# Altium PCB PCB.PcbDoc
Units mm, origin at the board's own origin, x right, y up, seen from the top; angles counter-clockwise.
Board outline 48.53 x 25.4 mm, 2 copper layers (Top, Bottom), stack 1.536 mm thick; 44 components, 40 nets, 171 pads, 87 vias.
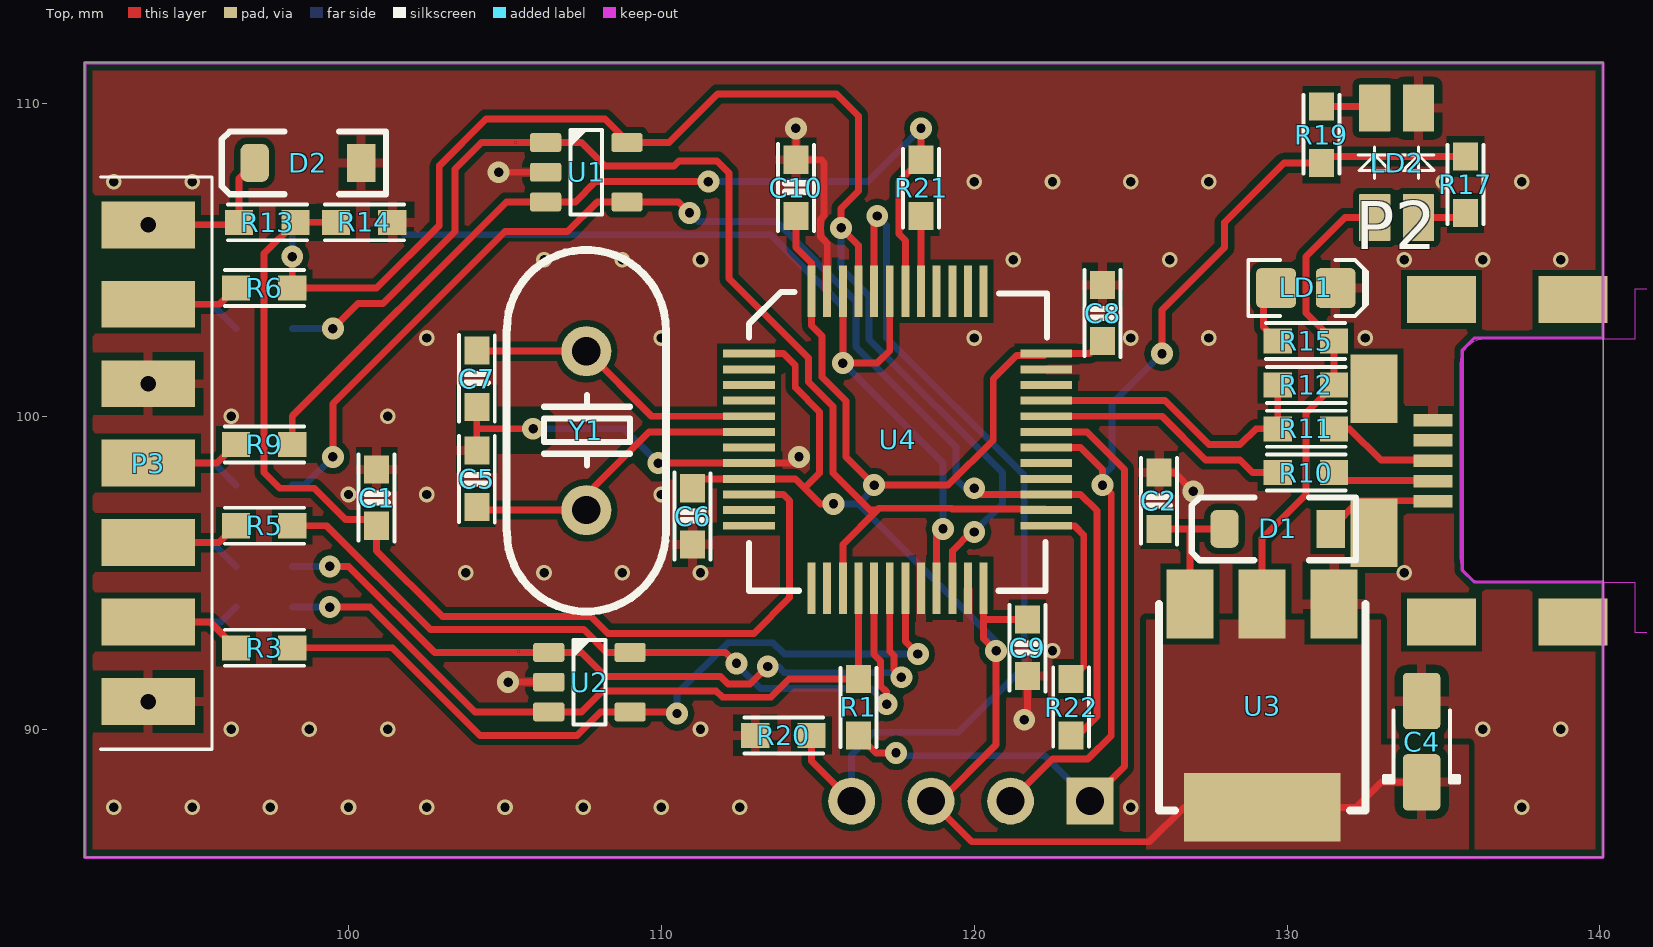
[diagram p0: Top view]
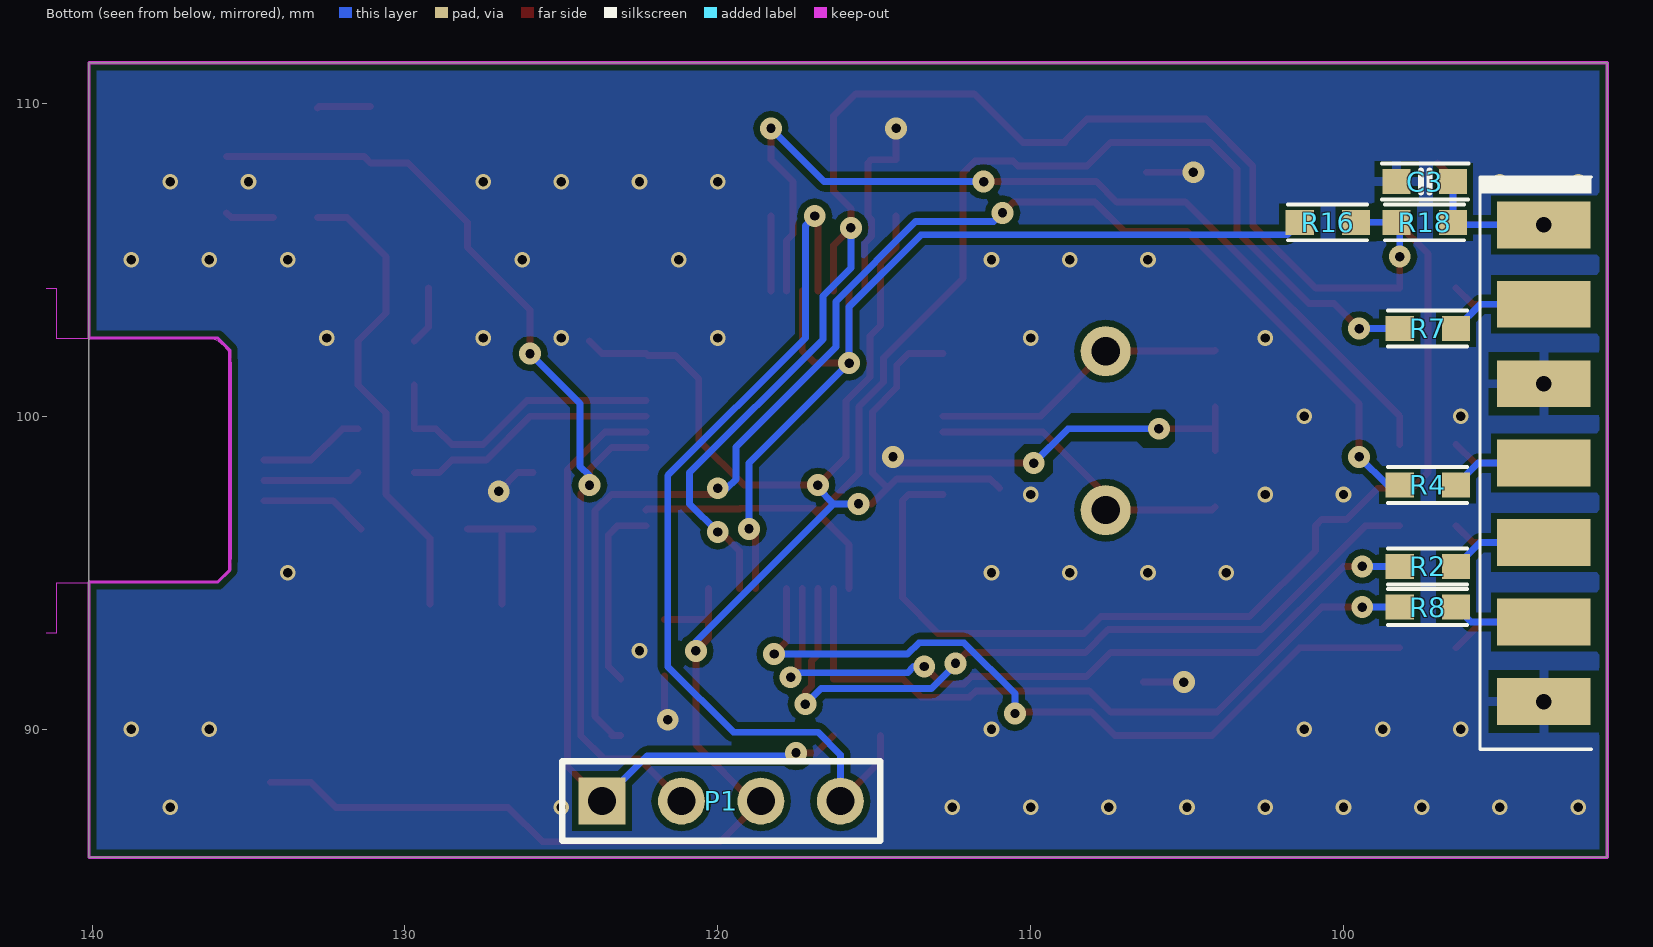
[diagram p1: Bottom view, seen from below]
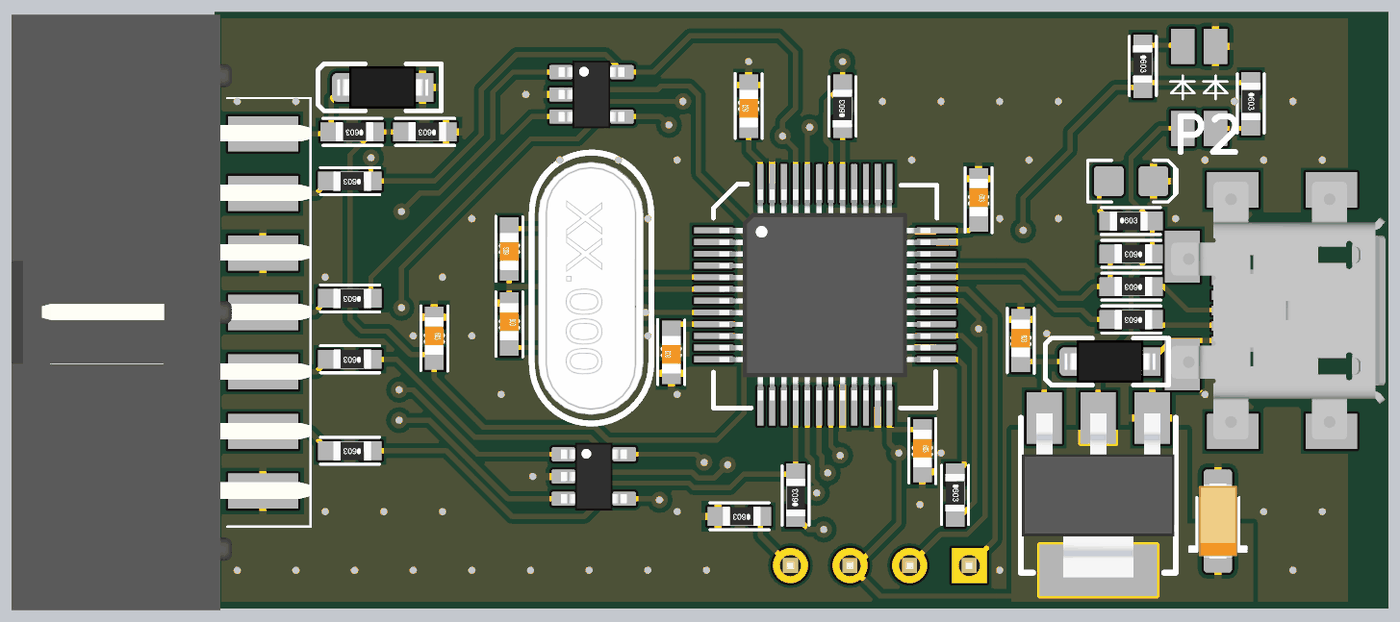
[diagram p2: 3D render of the assembled board from above, using the file's embedded part models]
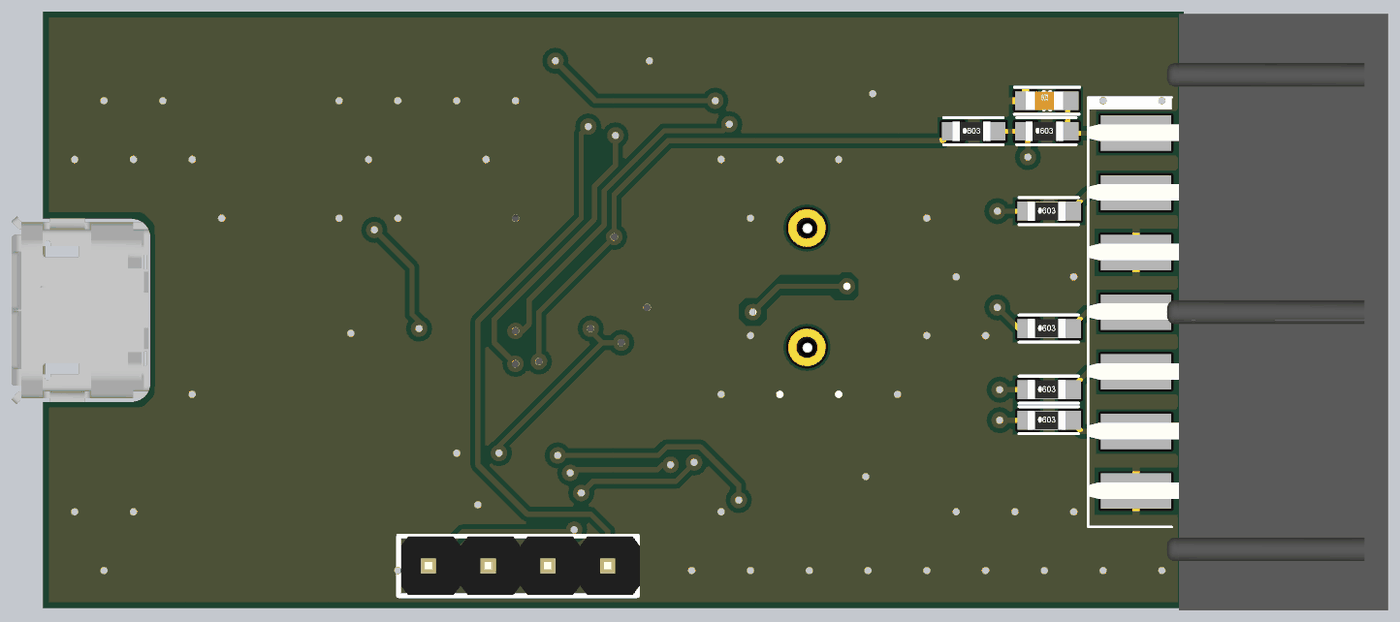
[diagram p3: 3D render of the assembled board from below, using the file's embedded part models]

## Layer stack, top to bottom
Top Solder: solder mask 0.01, Solder Resist, Dk 3.5
Top: signal copper 0.018
Dielectric 1: dielectric 1.5, FR-4, Dk 4.8
Bottom: signal copper 0.018
Bottom Solder: solder mask 0.01, Solder Resist, Dk 3.5

## Board outline
91.568,85.9 91.568,111.3 140.1,111.3 140.1,85.9

## Design rules (kind name [scope] priority, off if disabled: settings)
Clearance [All] p1: gap=0.2
FanoutControl Fanout_BGA [IsBGA] p1: bgadir=Out bgaviamode=Centered fanoutstyle=Auto fanoutdirection=InOnly viagrid=0.025 // Fanout_BGA (Default Rule)
PolygonConnect PolygonConnect_3 [((ObjectKind = 'Pad') And (Net = 'GND') And (Component = 'P1') And (AsMM(PadXSize_AllLayers) = 1.5) And (AsMM(PadYSize_AllLayers) = 1.2)) OR ((ObjectKind = 'Pad') And (Net = 'GND') And (Component = 'P1') And (AsMM(PadXSize_AllLayers) = 2.4) And (AsMM(PadYSize_AllLayers) = 1.6))] p1: connectstyle=Direct reliefconductorwidth=0.254 reliefentries=4 polygonreliefangle="90 Angle" airgapwidth=0.254
PolygonConnect PolygonConnect_2 [(ObjectKind = 'Via')] p2: connectstyle=Direct reliefconductorwidth=0.254 reliefentries=4 polygonreliefangle="90 Angle" airgapwidth=0.254
PolygonConnect PolygonConnect_1 [(ObjectKind = 'Pad') And (Net = '+3V3') And (Component = 'U3')] p3: connectstyle=Direct reliefconductorwidth=0.254 reliefentries=4 polygonreliefangle="90 Angle" airgapwidth=0.254
PolygonConnect [All] p4: connectstyle=Relief reliefconductorwidth=0.3 reliefentries=4 polygonreliefangle="90 Angle" airgapwidth=0.254
RoomDefinition St-LinkV2 [InComponentClass('St-LinkV2')] p1: confinementstyle=ConfineIn formatcopy=TRUE lockcomponents=FALSE outline 0,0 50.8,0 50.8,25.4 0,25.4
RoutingVias [All] p1: holewidth=0.7 width=1.27 viastyle="Through Hole" minholewidth=0.3 minwidth=0.7 maxholewidth=0.5 maxwidth=1
SolderMaskExpansion [All] p1: expansion=0.102
Width [All] p1: maxlimit=0.4 minlimit=0.22 preferedwidth=0.3
29 further rules are at their usual default settings.

## Components (designator, comment, footprint, x,y, rotation, side; value= is the part's Value field where it differs from the comment)
C1 "0u1" C0603C 100.9,98.3 r270 top
C2 "0u1" C0603C 125.9,98.2 r270 top
C3 "0u1" C0603C 98.3,107.5 r180 bottom
C4 "22u" CAPMP3216X180N 134.3,89.6 r90 top
C5 "22p" C0603C 104.1,98.9 r270 top
C6 "0u1" C0603C 111,95.9 r90 top
C7 "22p" C0603C 104.1,100.3 r90 top
C8 "0u1" C0603C 124.1,104.2 r270 top
C9 "0u1" C0603C 121.7,93.5 r270 top
C10 "0u1" C0603C 114.3,106.4 r90 top
D1 "MBR0520" SOD-123 129.7,96.4 r180 top
D2 "MBR0520" SOD-123 98.7,108.1 r180 top
LD1 "Led Green" LED0805 130.6,104.1 r0 top
LD2 "FYLS-1210 EGW" FYLS-1210 133.5,108.1 r90 top
P1 "Header 4" HDR1X4 123.7,87.7 r180 bottom
P2 "47491-0001" 47491-0001 135.534,98.577 r180 top
P3 "Header 7X2" IDC-14MS-EDGE 93.6,98.5 r270 top
R1 "10R" C0603R 116.3,89.8 r90 top
R2 "22R" C0603R 98.2,95.2 r180 bottom
R3 "22R" C0603R 98.2,92.6 r180 top
R4 "22R" C0603R 98.2,97.8 r180 bottom
R5 "22R" C0603R 98.2,96.5 r180 top
R6 "22R" C0603R 98.2,104.1 r180 top
R7 "22R" C0603R 98.2,102.8 r180 bottom
R8 "22R" C0603R 98.2,93.9 r180 bottom
R9 "22R" C0603R 98.2,99.1 r180 top
R10 "22R" C0603R 131.5,98.2 r180 top
R11 "22R" C0603R 131.5,99.6 r180 top
R12 "1.5k" C0603R 131.5,101 r180 top
R13 "4.7k" C0603R 98.3,106.2 r180 top
R14 "4.7k" C0603R 101.4,106.2 r180 top
R15 "680R" C0603R 129.7,102.4 r0 top
R16 "220R" C0603R 101.4,106.2 r180 bottom
R17 "680R" C0603R 135.7,108.3 r270 top
R18 "680R" C0603R 98.3,106.2 r180 bottom
R19 "680R" C0603R 131.1,109.9 r270 top
R20 "100k" C0603R 114.8,89.8 r180 top
R21 "220R" C0603R 118.3,106.4 r90 top
R22 "220R" C0603R 123.1,91.6 r270 top
U1 "ESDA5V3SC5" SOT23-5 107.6,107.8 r0 top
U2 "ESDA5V3SC5" SOT23-5 107.7,91.5 r0 top
U3 "LM1117-3.3" SOT223 131.5,94 r180 top
U4 "STM32F103C8T6" LQFP48 112.8,102 r0 top
Y1 "8MHz" HC-49H 107.6,97 r270 top

## Footprints (in the part's own frame and the unit in brackets; to place one, negate y for a bottom-side part, rotate by r counter-clockwise, add the part's x,y. Pads: shape width x height; smd on the part's side, far side on the other; paste and mask are expansions set on the pad)
47491-0001 [mm]
  rect 1.25x0.4 smd: 1(0.875,1.3) 2(0.875,0.65) 3(0.875,0) 4(0.875,-0.65) 5(0.875,-1.3)
  rect 2.2x1.5 smd: TH(-3.6,5.15) TH(-3.6,-5.15) TH(0.6,5.15) TH(0.6,-5.15)
  rect 1.5x2.2 smd: TH(2.75,2.3) TH(2.75,-2.3)
  Keep-Out Layer board cut-out: -6,-5.5 -6,5.5 -5.6,5.5 -5.6,3.9 -0.8,3.9 -0.494,3.839 -0.234,3.666 -0.061,3.406 0,3.1 0,3.1 0,-3.1 -0.061,-3.406 -0.234,-3.666 -0.494,-3.839 -0.8,-3.9 -0.8,-3.9 -5.6,-3.9 -5.6,-5.5
  body extent -5.91,-5.5 3.22,5.5, height 1.47
C0603C [mm]
  rect 0.9x0.8 smd: 1(0,0) 2(1.8,0)
  silkscreen extent -0.48,-0.58 2.3,0.58, body extent 0,-0.4 1.6,0.4, height 0.3
C0603R [mm]
  rect 0.9x0.8 smd: 1(0,0) 2(1.8,0)
  silkscreen extent -0.37,-0.58 2.15,0.58, body extent 0,-0.41 1.6,0.41, height 0.45
CAPMP3216X180N [mm] "Capacitor, polarized, Molded Body, EIA 535BAAC size A; 3.20mm L X 1.60mm W X 1.80mm H"
  round 0.508 on Mech15: 0(0,0)
  rrect25% 1.8x1.2 smd: 1(-1.3,0) 2(1.3,0)
  silkscreen extent -1.3,-1.2 1,1.2, body extent -1.6,-0.8 1.6,0.8, height 1.8
FYLS-1210 [mm] "Generic 1210 Bi-Colour SMT LED"
  rrect5% 1.5x1 smd: 1(-1.75,0.7) 2(1.75,0.7) 3(-1.75,-0.7) 4(1.75,-0.7)
  silkscreen extent -0.5,-1.2 0.5,1.22
HC-49H [mm]
  round 1.6 hole 0.9: 1(0,0) 2(-5.08,0)
  silkscreen extent -8.32,-2.55 3.24,2.55, body extent -7.92,-2.27 2.88,2.23, height 3.5
HDR1X4 [mm] "Connector; Header; 4 Position"
  rect 1.5x1.5 hole 0.9: 1(0,0)
  round 1.5 hole 0.9: 2(2.54,0) 3(5.08,0) 4(7.62,0)
  silkscreen extent -1.27,-1.27 8.89,1.27, body extent -1.17,-1.25 8.99,1.25, height 8.2
IDC-14MS-EDGE [mm]
  rect 1.5x3 smd far side: 1(-7.62,0) 3(-5.08,0) 5(-2.54,0) 7(0,0) 9(2.54,0) 11(5.08,0) 13(7.62,0)
  rect 1.5x3 smd: 2(-7.62,0) 4(-5.08,0) 6(-2.54,0) 8(0,0) 10(2.54,0) 12(5.08,0) 14(7.62,0)
  Keep-Out Layer lines w0.1: 10.16,-2.032 -10.16,-2.032
  silkscreen extent -9.14,-1.52 9.14,2.03, body extent -12.7,-10.72 12.7,1.98, height 3.57
LED0805 [mil]
  round 20 on Mech15: 0(0,0)
  rrect25% 50x50 smd: 1(-37.5,0) 2(37.5,0)
  Top pour cut-out: -15,30 15,30 15,-30 -15,-30
  silkscreen extent -72,-35 77,35, body extent -39,-25 39,25, height 31
LQFP48 [mm]
  rect 1.65x0.254 smd: 1(0,0) 2(0,-0.5) 3(0,-1) 4(0,-1.5) 5(0,-2) 6(0,-2.5) 7(0,-3) 8(0,-3.5) 9(0,-4) 10(0,-4.5) 11(0,-5) 12(0,-5.5) 25(9.5,-5.5) 26(9.5,-5) 27(9.5,-4.5) 28(9.5,-4) 29(9.5,-3.5) 30(9.5,-3) 31(9.5,-2.5) 32(9.5,-2) 33(9.5,-1.5) 34(9.5,-1) 35(9.5,-0.5) 36(9.5,0)
  rect 0.254x1.65 smd: 13(2,-7.5) 14(2.5,-7.5) 15(3,-7.5) 16(3.5,-7.5) 17(4,-7.5) 18(4.5,-7.5) 19(5,-7.5) 20(5.5,-7.5) 21(6,-7.5) 22(6.5,-7.5) 23(7,-7.5) 24(7.5,-7.5) 37(7.5,2) 38(7,2) 39(6.5,2) 40(6,2) 41(5.5,2) 42(5,2) 43(4.5,2) 44(4,2) 45(3.5,2) 46(3,2) 47(2.5,2) 48(2,2)
  silkscreen extent 0,-7.58 9.53,1.97, body extent 0.25,-7.26 9.25,1.74, height 1.56
SOD-123 [mm]
  rrect50% 0.91x1.22 smd: 1(1.7,0)
  rect 0.91x1.22 smd: 2(-1.7,0)
  silkscreen extent -2.5,-1 2.75,1, body extent -1.93,-0.9 1.93,0.9, height 1.22
SOT23-5 [mm]
  round 0.5 on Mech15: 0(0,0)
  rrect25% 1x0.6 smd: 1(-1.3,0.95) 2(-1.3,0) 3(-1.3,-0.95) 4(1.3,-0.95) 5(1.3,0.95)
  silkscreen extent -0.51,-1.35 0.51,1.35, body extent -1.4,-1.45 1.4,1.45, height 1.44
SOT223 [mm]
  rect 1.5x2.2 smd: 1(0,0) 2(2.3,0) 3(4.6,0)
  rect 5x2.2 smd: 2(2.3,6.5)
  silkscreen extent -1,0 5.6,6.6, body extent -0.95,-0.2 5.55,6.8, height 1.64

## Part data
C1 C2 C3 C6 C8 C9 C10: library part Cap0u1, "Capacitor 0u1"
C4: library part CapPolar22u, "Polarized capacitor 22u*10V"
C5 C7: library part Cap22p, "Capacitor 22p"
D1 D2: "Diode MBR0520"
LD1: "Diode Led Green"
LD2: "*"
P1: "Connector Header 4"
P2: "Micro-USB B Receptacle, Mid-Mount, Matte Tin Plated Shell, Lead-Free"
P3: library part IDC-14MS-EDGE, "Connector IDC-14MS-EDGE"
R1: library part "Res-10R-SMD 0603", "Resistor 10R SMD 0603"
R2 R3 R4 R5 R6 R7 R8 R9 R10 R11: library part "Res-22R-SMD 0603", "Resistor 22R SMD 0603"
R12: library part "Res-1.5k-SMD 0603", "Resistor 1.5k SMD 0603"
R13 R14: library part "Res-4.7k-SMD 0603", "Resistor 4.7k SMD 0603"
R15 R17 R18 R19: library part "Res-680R-SMD 0603", "Resistor 680R SMD 0603"
R16 R21 R22: library part "Res-220R-SMD 0603", "Resistor 220R SMD 0603"
R20: library part "Res-100k-SMD 0603", "Resistor 100k SMD 0603"
U1 U2: "Quad Zenner array for ESD protection, 5.3V"
U3: "Voltage Regulators LM1117-3.3"
U4: "Microcontroller STM32F103C8T6"
Y1: library part 8MHz-HC-49H, "Crystal 8MHz"

## Via types
v1: diameter 0.5, hole 0.3, Top to Bottom, tented both sides, 50 vias
v2: diameter 0.7, hole 0.3, Top to Bottom, tented both sides, 34 vias
v3: diameter 1, hole 0.5, Top to Bottom, 3 vias

## Nets (pads, with @x,y where several pads share a name; then routed paths per layer and width w, separated by ;. In a path a pad name is that pad's centre, name@x,y a point inside that pad or via, vN(x,y) a via of type N, cw(c..) or ccw(c..) an arc to the next point about the centre after c; other vN are vias at no path point)
+3V3: C4.1 C6.2 C8.2 C9.1 C10.1 LD2.1 P1.3 R12.1 R15.2 U3.2 U4.1 U4.9 U4.24 U4.36 U4.48 | length 80.7
  Top w0.22: C6.2 111.3,98 U4.9 114.28,98 114.58,97.7 ; U4.1 113.9,102 114.28,101.62 114.28,100.92 115.06,100.14 115.06,98.18 114.58,97.7 ; C10.1 114.3,105.4 114.8,104.9 U4.48 114.8,102.9 115.14,102.56 115.14,101.248 115.9,100.488 115.9,98.7 v2(116.8,97.8) 119.167,97.8 120.61,99.243 120.61,101.2 121.347,101.937 122.237,101.937 U4.36 123.7,102 C8.2 ; v2(115.5,97.2) 115.08,97.2 114.58,97.7 ; U4.24 120.3,93.5 ; C9.1 120.3,93.5 ; U3.2@129.2,94 129.2,96.1 130.6,97.5 130.6,100.1 R12.1 R15.2 130.6,103.3 130.6,105.1 131.85,106.35 LD2.1 ; C4.1 133,88.3 132.2,87.5 129.2,87.5 126.7,87.5 125.6,86.4 119.92,86.4 P1.3 118.9,87.7 120.7,89.5 v2(120.7,92.5) 120.3,92.9 120.3,93.5
  Bottom w0.22: v2(115.5,97.2) 116.3,97.2 ; v2(116.8,97.8) 116.8,97.7 116.3,97.2 ; v2(120.7,92.5) 120.7,92.8 116.3,97.2
+5V_USB: C2.2 D1.1 U3.3 | length 4.5
  Top w0.22: C2.2 126.9,96.4 ; U3.3 126.9,96.4 ; D1.1 126.9,96.4
BOOT0: P1.4 R20.1 U4.44 | length 29.6
  Top w0.22: R20.1 114.8,88.98 P1.4 ; U4.44 116.8,106.3 v2(116.9,106.4)
  Bottom w0.22: P1.4 116.08,89.18 116.8,89.9 119.5,89.9 121.6,92 121.6,98.1 117.2,102.5 117.2,106.1 v2(116.9,106.4)
GND: C1.1 C2.1 C3.1 C4.2 C5.1 C6.1 C7.1 C8.1 C9.2 C10.2 D2.2 LD1.2 LD2.4 P2.4 P2.5 P3.5 P3.6 P3.13 P3.14 R14.1 R20.2 U1.2 U2.2 U3.1 U4.8 U4.20 U4.23 U4.35 U4.47 | length 24.5
  Top w0.22: C5.1 104.1,99.6 ; C7.1 104.1,99.6 ; v2(104.8,107.8) U1.2 ; v2(105.1,91.5) U2.2 ; v2(105.9,99.6) 104.1,99.6 ; v2(109.9,98.5) U4.8 114.5,98.5 114.4,98.6 v2(114.4,98.7) v2@114.2,98.5 ; v2(114.3,109.2) C10.2 115.1,108.2 115.2,108.1 115.2,106.411 115.083,106.294 115.083,105.748 115.3,105.531 U4.47 ; v2(121.6,90.3) 121.7,90.4 C9.2 ; C2.1 126.4,98.2 v2(127,97.6)
  Bottom w0.22: v2(105.9,99.6) 108.8,99.6 v2(109.9,98.5)
  other v1: 92.5,87.5 95,87.5 97.5,87.5 100,87.5 102.5,87.5 105,87.5 107.5,87.5 110,87.5 112.5,87.5 125,87.5 137.5,87.5 96.25,90 98.75,90 101.25,90 111.25,90 136.25,90 138.75,90 122.5,92.5 103.75,95 106.25,95 108.75,95 111.25,95 133.75,95 100,97.5 102.5,97.5 110,97.5 96.25,100 101.25,100 102.5,102.5 110,102.5 120,102.5 125,102.5 127.5,102.5 132.5,102.5 106.25,105 108.75,105 111.25,105 121.25,105 126.25,105 133.75,105 136.25,105 138.75,105 92.5,107.5 95,107.5 120,107.5 122.5,107.5 125,107.5 127.5,107.5 135,107.5 137.5,107.5
  other v3: 93.6,90.88 93.6,101.04
NetC5_2: C5.2 U4.6 Y1.1 | length 10.1
  Top w0.22: C5.2 104.2,97 Y1.1 107.6,97.5 109.6,99.5 U4.6
NetC7_2: C7.2 U4.5 Y1.2 | length 9.6
  Top w0.22: C7.2 104.12,102.08 Y1.2 109.68,100 U4.5
NetD1_2: D1.2 P2.1 | length 3.5
  Top w0.22: D1.2 132.3,97.3 P2.1@134.5,97.3
NetLD1_1: LD1.1 R15.1 | length 1.9
  Top w0.22: LD1.1@129.248,104.1 129.248,102.852 R15.1
NetLD2_2: LD2.2 R19.1 | length 1.7
  Top w0.22: R19.1 132.75,109.9 LD2.2
NetLD2_3: LD2.3 R17.2 | length 1.6
  Top w0.22: LD2.3 135.55,106.35 R17.2
NetP2_2: P2.2 R10.1 | length 3.1
  Top w0.22: R10.1 131.75,97.95 P2.2@134.5,97.95
NetP2_3: P2.3 R11.1 | length 3.4
  Top w0.22: R11.1 132,99.6 133,98.6 P2.3@134.5,98.6
NetP3_3: P3.3 R7.2 | length 3.1
  Bottom w0.22: P3.3 95.62,103.58 R7.2
NetP3_4: P3.4 R6.2 | length 3
  Top w0.22: P3.4 95.88,103.58 R6.2
NetP3_7: P3.7 R4.2 | length 3.1
  Bottom w0.22: P3.7 95.7,98.5 R4.2
NetP3_8: P3.8 R9.2 | length 3
  Top w0.22: P3.8 95.8,98.5 R9.2
NetP3_9: P3.9 R2.2 | length 3.1
  Bottom w0.22: P3.9 95.64,95.96 R2.2
NetP3_10: P3.10 R5.2 | length 3
  Top w0.22: P3.10 95.86,95.96 R5.2
NetP3_11: P3.11 R8.2 | length 3
  Bottom w0.22: P3.11 95.92,93.42 R8.2
NetP3_12: P3.12 R3.2 | length 3.1
  Top w0.22: P3.12 95.58,93.42 R3.2
NetR21_1: R21.1 U4.41 | length 2.4
  Top w0.22: U4.41 R21.1
NetR22_1: R22.1 U4.25 | length 6.1
  Top w0.22: U4.25 123.2,96.5 123.5,96.2 123.5,92 R22.1
NRST: U4.7
SENS_T_VOL: C1.2 R13.1 R14.2 U4.10 | length 34.1
  Top w0.22: R14.2 R13.1 97.3,105.2 97.3,98.2 97.8,97.7 98.9,97.7 99.9,96.7 100.7,96.7 C1.2 100.9,95.7 103,93.6 107.75,93.6 108.29,93.06 112.96,93.06 114.1,94.2 114.1,97.3 113.9,97.5 U4.10
SWCLK: U4.37
SWDIO: U4.34
SWIM: R6.1 R16.2 R18.1 U1.5 U4.22 U4.45 | length 46.6
  Top w0.22: v2(98.2,105.1) R6.1 100.9,104.1 102.9,106.1 102.9,108 104.4,109.5 108.2,109.5 108.9,108.8 U1.5 110.25,108.75 111.8,110.3 115.6,110.3 116.3,109.6 116.3,107.2 115.743,106.643 v2(115.743,106.021) 116.3,105.464 U4.45 ; U4.22 119.3,95.7 119.9,96.3 v2(120,96.3)
  Bottom w0.22: v2(98.2,105.1) 98.2,106.1 R18.1 R16.2 ; v2(115.743,106.021) 115.743,104.745 116.64,103.848 116.64,102.46 120.9,98.2 120.9,97.2 v2(120,96.3)
SWIM_IN: R16.1 U4.21 U4.43 U4.46 | length 31.8
  Top w0.22: U4.46 v2(115.8,101.7) 116.9,101.7 117.3,102.1 U4.43 ; U4.21 118.8,96.2 v2(119,96.4)
  Bottom w0.22: R16.1 101.8,105.8 113.5,105.8 115.8,103.5 v2(115.8,101.7) 119,98.5 v2(119,96.4)
SWIM_RST: R9.1 R21.2 U1.3 U4.42 | length 30.4
  Top w0.22: R9.1 98.2,100 105.05,106.85 U1.3 107.25,106.85 107.9,107.5 v2(111.5,107.5) ; U4.42 117.8,105.612 117.59,105.822 117.59,106.988 117.6,106.998 117.6,107.5 R21.2 v2(118.3,109.2)
  Bottom w0.22: v2(111.5,107.5) 116.6,107.5 v2(118.3,109.2)
T_JRST: R3.1 U2.4 U4.19 | length 25.2
  Top w0.22: R3.1 101.4,92.6 104.2,89.8 107.3,89.8 108.05,90.55 U2.4 110.45,90.55 v2(110.5,90.5) ; U4.19 117.8,92.8 v2(118.2,92.4)
  Bottom w0.22: v2(110.5,90.5) 110.5,91.133 112.127,92.76 113.573,92.76 113.933,92.4 v2(118.2,92.4)
T_JTCK: R7.1 U1.1 U4.15 U4.26 | length 39.4
  Top w0.22: v2(99.5,102.8) 100.3,103.6 101.1,103.6 103.4,105.9 103.4,107.9 104.25,108.75 U1.1 107.444,108.75 108.194,108 110.4,108 110.56,108.16 111.773,108.16 112.16,107.773 112.16,104.407 114.7,101.867 114.7,101.094 115.48,100.314 115.48,98.187 116.667,97 116.9,97 ; U4.15 115.8,95.9 116.9,97 ; U4.26 122.26,97.04 119.293,97.04 119.273,97.06 116.96,97.06 116.9,97
  Bottom w0.22: R7.1 v2(99.5,102.8)
T_JTDI: R5.1 U2.5 U4.17 | length 25.2
  Top w0.22: R5.1 99.3,96.5 102.62,93.18 107.52,93.18 108.25,92.45 U2.5 112.05,92.45 v2(112.4,92.1) ; U4.17 116.8,92.388 117.01,92.178 117.01,91.384 117.2,91.194 v2(117.2,90.8)
  Bottom w0.22: v2(112.4,92.1) 112.4,92.067 113.167,91.3 116.7,91.3 v2(117.2,90.8)
T_JTDO: R1.2 R8.1 U2.3 U4.16 | length 23
  Top w0.22: v2(99.4,93.9) 100.694,93.9 104.044,90.55 U2.3 107.45,90.55 108.12,91.22 111.753,91.22 111.953,91.02 113.5,91.02 114.08,91.6 R1.2 U4.16
  Bottom w0.22: R8.1 v2(99.4,93.9)
T_JTMS: R4.1 R22.2 U1.4 U4.27 | length 43.7
  Top w0.22: v2(99.5,98.7) 99.5,100.4 105,105.9 107,105.9 107.95,106.85 U1.4 110.55,106.85 v2(110.9,106.5) ; v2(120,97.7) 120.2,97.5 U4.27 123.4,97.5 123.92,96.98 123.92,90.404 123.39,89.874 123.39,89.8 R22.2
  Bottom w0.22: R4.1 98.6,97.8 v2(99.5,98.7) ; v2(110.9,106.5) 111.18,106.22 113.674,106.22 116.22,103.674 116.22,102.213 119.42,99.013 119.42,97.98 119.7,97.7 v2(120,97.7)
T_NRST: R2.1 U2.1 U4.18 | length 24.2
  Top w0.22: v2(99.4,95.2) 100.006,95.2 102.756,92.45 U2.1 107.45,92.45 108.22,91.68 111.887,91.68 112.127,91.44 112.84,91.44 v2(113.4,92) ; U4.18 117.3,92.482 117.43,92.352 117.43,91.897 v2@117.564,91.764
  Bottom w0.22: R2.1 v2(99.4,95.2) ; v2(113.4,92) 113.739,92 113.939,91.8 117.527,91.8 v2(117.67,91.657)
U1_RX: P1.1 R1.1 U4.31 | length 22.3
  Top w0.22: R1.1 116.861,89.239 v2(117.5,89.239) ; U4.31 123.6,99.5 124.8,98.3 124.8,88.8 P1.1
  Bottom w0.22: v2(117.5,89.239) 117.589,89.15 122.25,89.15 P1.1
U1_TX: P1.2 R17.1 R19.2 U4.30 | length 33.4
  Top w0.22: P1.2 122.5,89.04 123.628,89.04 124.38,89.792 124.38,97.52 v2(124.1,97.8) 124.1,98.3 123.4,99 U4.30 ; v2(126,102) 126,103.4 128,105.4 128,106.2 129.9,108.1 R19.2 131.3,108.3 R17.1
  Bottom w0.22: v2(124.1,97.8) 124.1,98.1 124.4,98.4 124.4,100.4 v2(126,102)
USB_N: R10.2 U4.32 | length 8.1
  Top w0.22: U4.32 126,100 127.4,98.6 128.5,98.6 128.9,98.2 R10.2
USB_P: R11.2 R12.2 U4.33 | length 9.6
  Top w0.22: U4.33 126.1,100.5 127.5,99.1 128.5,99.1 129,99.6 R11.2 R12.2
VTG: C3.2 D2.1 P3.1 P3.2 R13.2 R18.2 | length 9.3
  Top w0.22: v3(93.6,106.12) 96.42,106.12 R13.2 96.5,107.6 D2.1
  Bottom w0.22: v3(93.6,106.12) 96.42,106.12 R18.2 C3.2
pads on no net: C4.0 LD1.0 P2.TH U1.0 U2.0 U4.2 U4.3 U4.4 U4.11 U4.12 U4.13 U4.14 U4.28 U4.29 U4.38 U4.39 U4.40

## Polygon pours and split planes (outlines as drawn)
+3V3 on Top "Top-No Net" (solid, pour order 2): 125.5,85.9 125.5,93.5 133,93.5 133,89.5 135.8,89.5 135.8,85.9
GND on Top "Top-No Net" (solid, remove dead copper, pour order 7): 91.6,111.2 140.1,111.2 140.1,85.9 91.568,85.9
GND on Bottom "Top-No Net" (solid, pour order 4): 91.6,111.2 91.6,85.9 140.1,85.9 140.1,111.2 139.1,111.2

## Keep-outs
Keep-Out Layer:
  lines w0.1: 91.568,88.34 91.568,85.9 140.1,85.9 ; 91.568,108.66 91.568,111.3 ; 91.568,108.66 91.568,108.66 ; 91.568,111.3 91.568,111.3 ; 91.568,111.3 140.1,111.3 ; 91.568,111.3 91.568,111.3 ; 140.1,85.9 140.1,85.9 ; 140.1,85.9 140.1,94.7 140.093,94.707 135.975,94.707 135.6,95.082 135.6,102.118 135.982,102.5 140.1,102.5 140.1,111.3 ; 140.1,111.3 140.1,111.3

## Other copper
Top:
  pour cut-out: 104.1,100.3 104.1,98.8 106.2,98.8 106.6,99.2 106.6,100 106.3,100.3
  pour cut-out: 112.9,98.8 112.9,98.2 110.5,98.2 110.2,97.9 109.7,97.9 109.1,98.5 109.6,99 110.4,99 110.6,98.8
Bottom:
  pour cut-out: 105.4,99.2 105.6,99 106.4,99 106.6,99.2 108.7,99.2 109.3,98.6 109.3,98.2 109.6,97.9 110.2,97.9 110.5,98.2 110.5,98.8 110.2,99.1 109.7,99.1 108.7,100.1 106.2,100.1 106.1,100.2 105.7,100.2 105.4,99.9

## Dimensions
91.568,85.9 to 91.568,111.3 on Mechanical 16
91.568,111.2 to 140.1,111.3 on Mechanical 16